# Altium PCB 2022 Power Distribution Board.PcbDoc
Units mil, origin at the board's own origin, x right, y up, seen from the top; angles counter-clockwise.
Board outline 1811.02 x 5944.88 mil, 2 copper layers (Top Layer, Bottom Layer); 23 components, 23 nets, 126 pads, 2 vias.
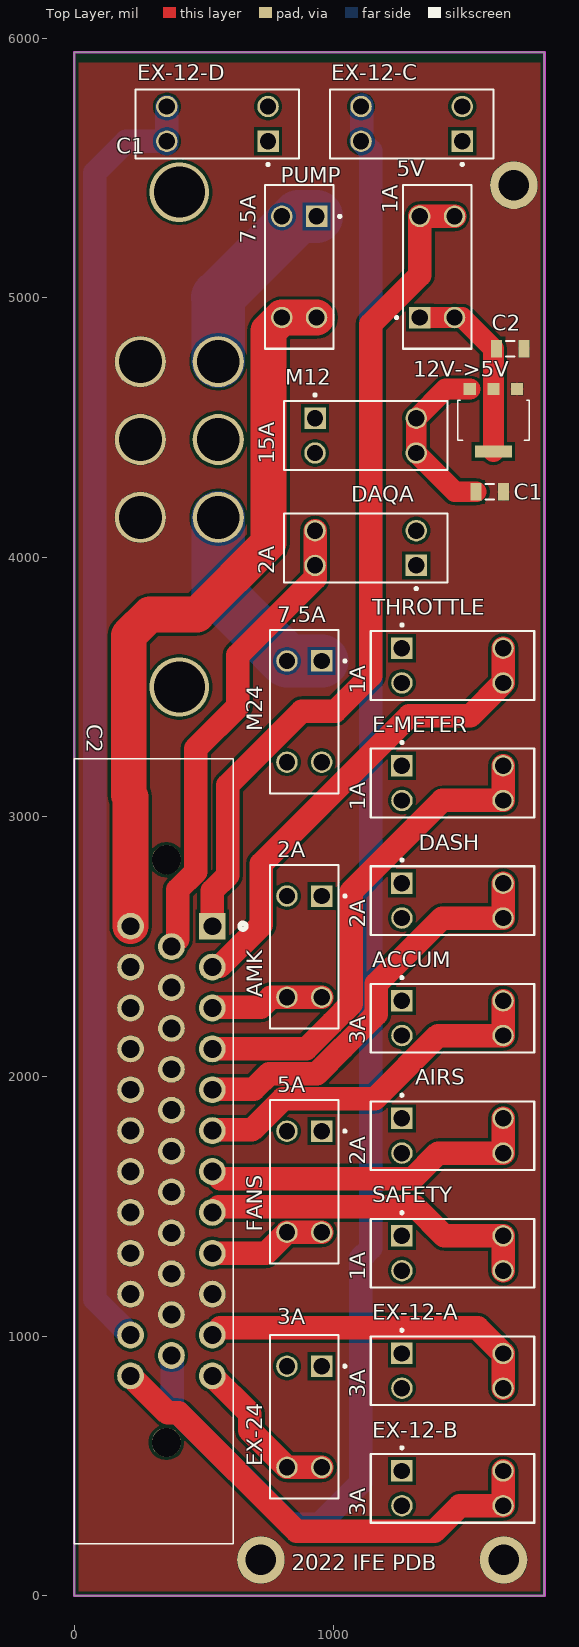
[diagram p0: Top Layer view]
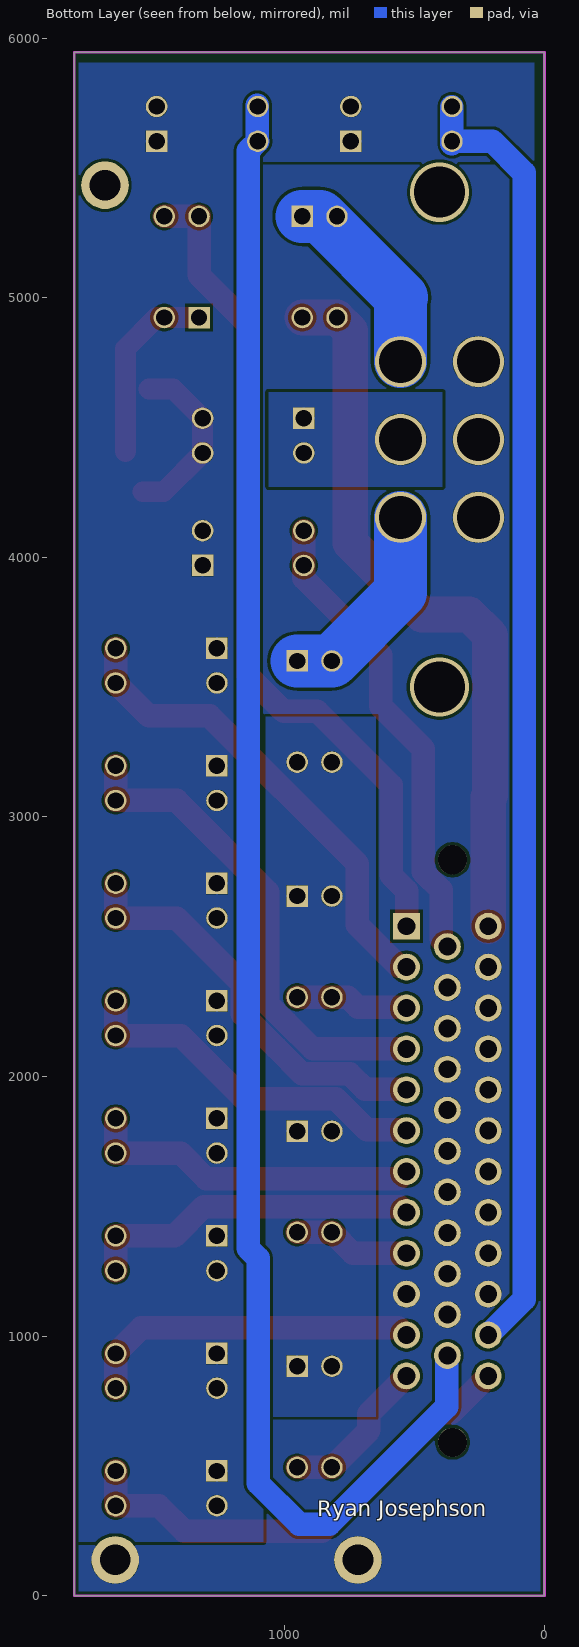
[diagram p1: Bottom Layer view, seen from below]
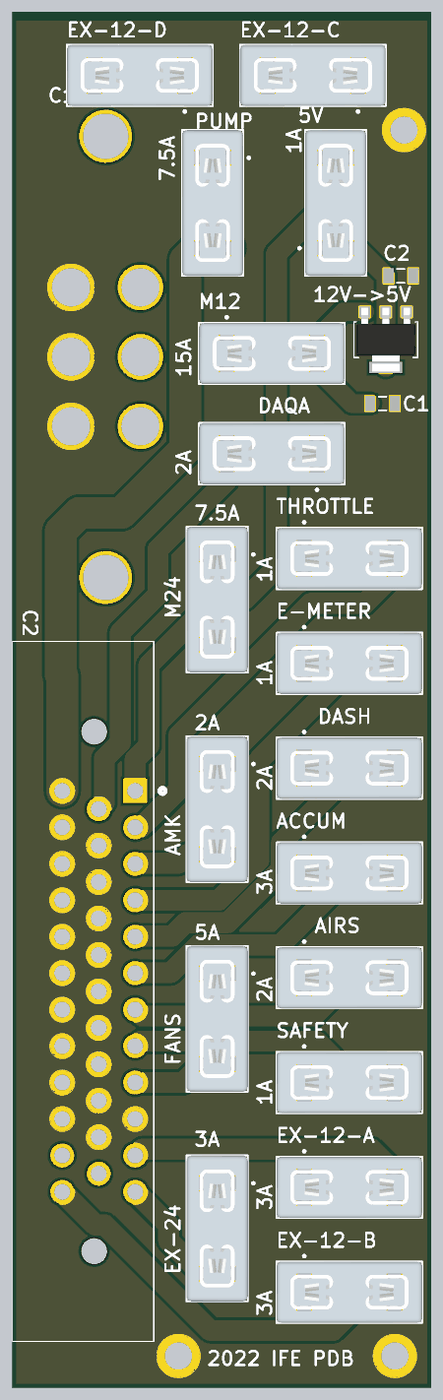
[diagram p2: 3D render of the assembled board from above, using the file's embedded part models]

## Layer stack, top to bottom
Top Solder: solder mask 0.4, Solder Resist, Dk 3.5
Top Layer: signal copper 2.7559
Dielectric 1: dielectric 12.6, FR-4, Dk 4.8
Bottom Layer: signal copper 2.7559
Bottom Solder: solder mask 0.4, Solder Resist, Dk 3.5

## Board outline
0,0 0,5944.88 1811.02,5944.88 1811.02,0

## Design rules (kind name [scope] priority, off if disabled: settings)
Clearance [All] p1: gap=11.81 ignorepadtopadclearanceinfootprint=FALSE except(5.12: SMDPad-SMDPad; 6: Arc-Arc Arc-Track Track-Track; 7.87: Arc-SMDPad Track-SMDPad)
Height [All] p1: minheight=0 maxheight=2000 prefheight=500
PolygonConnect [All] p1: connectstyle=Relief reliefconductorwidth=10 reliefentries=4 polygonreliefangle="90 Angle" airgapwidth=0
RoutingVias [All] p1: holewidth=11.81 width=23.62 viastyle="Through Hole" minholewidth=11.81 minwidth=23.62 maxholewidth=11.81 maxwidth=23.62
SolderMaskExpansion [All] p1: expansion=4 istentingtop=FALSE
Width [All] p1: maxlimit=354.33 minlimit=11.81 preferedwidth=137.8 toplayer_maxwidth=137.8 toplayer_prefwidth=90.55 minimp=50.000000 maximp=50.000000 favimp=50.000000
29 further rules are at their usual default settings.

## Components (designator, comment, footprint, x,y, rotation, side; value= is the part's Value field where it differs from the comment)
5V "5V Sensors" KSTN-3568_V 1397.64,5118.11 r90 top
12V->5V "LDO-SOT223_SPX1117" SOT223 1614.17,4527.56 r180 top (schematic designator "12V to 5V")
ACCUM "Accumulator" KSTN-3568_V 1456.69,2224.41 r0 top
AIRS "AIRS" KSTN-3568_V 1456.69,1771.65 r0 top
AMK "AMK" KSTN-3568_V 885.83,2500 r270 top
C1 "Cap Semi" C1206 1600.39,4251.97 r0 top value=4.7u
C1 "POWER/GND" 19437-0040-Footprint-1 554.33,4153.54 r90 top
C2 "Cap Semi" C1206 1679.13,4803.15 r0 top value=2.2u
C2 "35x CONN" TE_776163-5 354.33,1712.6 r270 top
DAQA "Sensor Board" KSTN-3568_V 1122.05,4035.43 r180 top
DASH "Dashboard" KSTN-3568_V 1456.69,2677.17 r0 top
E-METER "E-Meter" KSTN-3568_V 1456.69,3129.92 r0 top
EX-12-A "EX-12-A" KSTN-3568_V 1456.69,866.14 r0 top
EX-12-B "EX-12-B" KSTN-3568_V 1456.69,413.39 r0 top
EX-12-C "EX-12-C" KSTN-3568_V 1299.21,5669.29 r180 top
EX-12-D "EX-12-D" KSTN-3568_V 551.18,5669.29 r180 top
EX-24 "EX-24" KSTN-3568_V 885.83,688.98 r270 top
FANS "Fans" KSTN-3568_V 885.83,1594.49 r270 top
M12 "MASTER 12V" KSTN-3568_V 1122.05,4468.5 r0 top
M24 "MASTER 24V" KSTN-3568_V 885.83,3405.51 r270 top
PUMP "Pump" KSTN-3568_V 866.14,5118.11 r270 top
SAFETY "Safety" KSTN-3568_V 1456.69,1318.9 r0 top
THROTTLE "Throttle" KSTN-3568_V 1456.69,3582.68 r0 top

## Footprints (in the part's own frame and the unit in brackets; to place one, negate y for a bottom-side part, rotate by r counter-clockwise, add the part's x,y. Pads: shape width x height; smd on the part's side, far side on the other; paste and mask are expansions set on the pad)
19437-0040-Footprint-1 [mm]
  round 5 hole 4.2: 0(15.24,0) 1(7.62,0) 2(0,0) 3(15.24,7.62) 4(7.62,7.62) 5(0,7.62)
C1206 [mm] "Chip Capacitor, Body 3.2x1.6mm, IPC High Density"
  rect 1.1x1.7 smd: 1(-1.35,0) 2(1.35,0)
  silkscreen extent -0.4,-0.75 0.4,0.75, body extent -1.7,-0.9 1.7,0.9, height 1.3
KSTN-3568_V [mm] "THD, 4-Leads, Body 16x6.73mm, Pitch 9.9mm"
  rect 2.1x2.1 hole 1.6: 1(-4.95,1.7)
  round 2.1 hole 1.6: 2(-4.95,-1.7) 3(4.95,1.7) 4(4.95,-1.7)
  silkscreen extent -8,-3.36 8,4.09, body extent -8,-3.37 8,3.37, height 7.44
SOT223 [mm]
  rect 1.2x1.2 smd: 1(-2.3,-3.05) 2(0,-3.05) 3(2.3,-3.05)
  rect 3.6x1.2 smd: 4(0,3.05)
  silkscreen extent -3.5,-1.95 3.5,1.95, body extent -3.25,-3.52 3.25,3.5, height 1.8
TE_776163-5 [mm]
  rect 2.625x2.625 hole 1.75: 1(-22,4.5)
  round 2.625 hole 1.75: 2(-18,4.5) 3(-14,4.5) 4(-10,4.5) 5(-6,4.5) 6(-2,4.5) 7(2,4.5) 8(6,4.5) 9(10,4.5) 10(14,4.5) 11(18,4.5) 12(22,4.5) 13(-20,0.5) 14(-16,0.5) 15(-12,0.5) 16(-8,0.5) 17(-4,0.5) 18(0,0.5) 19(4,0.5) 20(8,0.5) 21(12,0.5) 22(16,0.5) 23(20,0.5) 24(-22,-3.5) 25(-18,-3.5) 26(-14,-3.5) 27(-10,-3.5) 28(-6,-3.5) 29(-2,-3.5) 30(2,-3.5) 31(6,-3.5) 32(10,-3.5) 33(14,-3.5) 34(18,-3.5) 35(22,-3.5)
  round 2.85 hole 2.85 unplated: ""(-28.5,0) ""(28.5,0)
  silkscreen extent -38.4,-9 38.4,7.8

## Part data
5V ACCUM AIRS AMK DAQA DASH E-METER EX-12-A EX-12-B EX-12-C EX-12-D EX-24 FANS M12 M24 PUMP SAFETY THROTTLE: library part CMP-2000-05464-1, "Fuse Holder, 20 A, 500 V, -50 to 145 degC, 4-Pin THD, RoHS", Manufacturer=Keystone, Package Description="4-Pin Through Hole Device, Body 16 x 6.73 mm, Pitch 9.9 mm", Package Reference=3568, Datasheet URL=https://datasheet.ciiva.com/16294/m60-2p40-16294706.pdf, Datasheet Version=04/2013, Manufacturer URL=http://www.keyelco.com/, Mounting Technology=ThroughHole
12V->5V: library part CMP-009-000254-1, Design Item ID=LDO-SOT223_SPX1117, Source=ife19_Elec_Library.schlib
C1 C2: "Capacitor (Semiconductor SIM Model)", LatestRevisionDate=29-May-2009, LatestRevisionNote="IPC-7351 Footprint Added.", PackageDescription="Chip Capacitor", PackageReference=C1206, Published=8-Jun-2000, Publisher="Altium Limited"
C1: library part 19437-0040, ComponentLink1Description="New link", ComponentLink1URL=https://www.mouser.com/ProductDetail/Molex/19437-0040?qs=IvjI65BR3TWbILBHf7ByJQ%3D%3D
C2: library part 776163-5, "Conn Power HDR 23 POS 4mm Solder RA Thru-Hole 23 Terminal 1 Port Automotive", Package=None, Availability=Unavailable, MF="{'manufacturer': 'TE Connectivity'}", MP=776163-5, Price=None

## Free pads (board coordinates)
  round 183.07 hole 118.11: 9(1692.91,5433.07) 10(718.5,137.8) 11(1653.54,137.8)

## Via types
v1: diameter 228.35, hole 196.85, Top Layer to Bottom Layer, 2 vias

## Nets (pads, with @x,y where several pads share a name; then routed paths per layer and width w, separated by ;. In a path a pad name is that pad's centre, name@x,y a point inside that pad or via, vN(x,y) a via of type N, cw(c..) or ccw(c..) an arc to the next point about the centre after c; other vN are vias at no path point)
+5: 5V.1 5V.2 12V->5V.2 12V->5V.4 C2.1@1625.98,4803.15 | length 728.9
  Top Layer w80: 5V.1 5V.2 1494.09,4923.23 1614.17,4803.15 12V->5V.2 12V->5V.4
ACCUMULATOR: ACCUM.3 ACCUM.4 C2.6 | length 1405.6
  Top Layer w90.55: C2.6 533.94,1793.79 684.12,1793.79 803.62,1913.29 1156.82,1913.29 1401.01,2157.48 ACCUM.4 ACCUM.3
AIRS: AIRS.3 AIRS.4 C2.7 | length 1306.1
  Top Layer w90.55: C2.7 534.96,1633.86 562.52,1606.3 1302.58,1606.3 1401.01,1704.72 AIRS.4 AIRS.3
AMK: AMK.3 AMK.4 C2.3 | length 438.4
  Top Layer w90.55: C2.3 533.94,2266.23 718.51,2266.23 757.4,2305.12 AMK.4 AMK.3
DASHBOARD: C2.5 DASH.3 DASH.4 | length 1596
  Top Layer w90.55: C2.5 533.94,1951.27 691.42,1951.27 750,2009.84 933.08,2009.84 1033.38,2110.14 1033.52,2110.14 1147.73,2224.36 1147.73,2224.49 1163.39,2240.14 1163.39,2356.32 1417.3,2610.24 DASH.4 DASH.3
E-METER: C2.4 E-METER.3 E-METER.4 | length 1903.6
  Top Layer w90.55: C2.4 531.59,2106.39 893.09,2106.39 993.39,2206.69 993.52,2206.69 1065.94,2279.11 1065.94,2711.63 1417.3,3062.99 E-METER.4 E-METER.3
EX-12-A: C2.11 EX-12-A.3 EX-12-A.4 | length 1306.1
  Top Layer w90.55: C2.11 534.96,1003.94 562.52,1031.5 1553.15,1031.5 EX-12-A.3 EX-12-A.4
EX-12-B: C2.35 EX-12-B.3 EX-12-B.4 | length 1857.5
  Top Layer w90.55: C2.35 359.25,703.74 401.22,703.74 856.92,248.03 1387.1,248.03 1485.52,346.46 EX-12-B.4 EX-12-B.3
EX-12-C: C2.23 EX-12-C.3 EX-12-C.4 | length 6515.9
  Bottom Layer w90.55: C2.23 376.46,922.75 376.46,728.49 829.36,275.59 944.88,275.59 1102.36,433.07 1102.36,1299.21 1141.73,1338.58 1141.73,5564.96 EX-12-C.3 ; EX-12-C.3@1106.3,5602.36 EX-12-C.4@1106.3,5740.74
EX-12-D: C2.34 EX-12-D.3 EX-12-D.4 | length 5005.3
  Bottom Layer w90.55: C2.34 78.74,1141.73 78.74,5480.39 200.72,5602.36 EX-12-D.3 ; EX-12-D.3@356.3,5592.52 EX-12-D.4
EX-24: C2.12 EX-24.3 EX-24.4 | length 605.3
  Top Layer w90.55: C2.12 676.42,701.53 676.42,636.57 EX-24.4 EX-24.3
FANS: C2.9 FANS.3 FANS.4 | length 454.7
  Top Layer w90.55: C2.9 738.19,1318.9 FANS.4 FANS.3
"FUSED 12V": 12V->5V.3 ACCUM.1 ACCUM.2 AIRS.1 AIRS.2 C1.1@1547.24,4251.97 DAQA.1 DAQA.2 DASH.1 DASH.2 E-METER.1 E-METER.2 EX-12-A.1 EX-12-A.2 EX-12-B.1 EX-12-B.2 EX-12-C.1 EX-12-C.2 EX-12-D.1 EX-12-D.2 M12.3 M12.4 SAFETY.1 SAFETY.2 THROTTLE.1 THROTTLE.2 | length 696
  Top Layer w11.81: C1.1@1535.43,4263.78 C1.1@1547.24,4251.97
  Top Layer w80: 12V->5V.3 1429.86,4647.64 1317.65,4535.43 M12.3 M12.4 1466.54,4251.97 C1.1@1547.24,4251.97
"FUSED 24V": AMK.1 AMK.2 EX-24.1 EX-24.2 FANS.1 FANS.2 M24.3 M24.4
GND: 12V->5V.1 C1.2@1653.54,4251.97 C1.3 C1.4 C1.5 C2.2@1732.28,4803.15 C2.10 C2.14 C2.15 C2.16 C2.17 C2.18 C2.19 C2.20 C2.21 C2.22 C2.25 C2.26 C2.27 C2.28 C2.29 C2.30 C2.31 C2.32 C2.33 pad.9 pad.10 pad.11
PUMP: C2.24 PUMP.3 PUMP.4 | length 2832.3
  Top Layer w137.8: C2.24 216.54,3076.39 209.45,3083.47 209.45,3698.81 290.17,3779.53 472.44,3779.53 748.03,4055.12 748.03,4872.05 PUMP.4 PUMP.3
"RAW 12V": C1.1@554.33,4453.54 M12.1 M12.2
"RAW 24V": C1.2@554.33,4153.54 M24.1 M24.2 | length 796.6
  Bottom Layer w204.72: C1.2@554.33,4153.54 554.33,3864.96 M24.2 M24.1
"RAW 48V": C1.0 PUMP.1 PUMP.2 | length 761.1
  Bottom Layer w204.72: 551.18,5000 554.33,5003.15 ; C1.0 554.33,5003.15 ; PUMP.1 864.17,5312.99 554.33,5003.15
SAFETY: C2.8 SAFETY.3 SAFETY.4 | length 1309.4
  Top Layer w90.55: C2.8 534.96,1476.38 556.61,1498.03 1313.02,1498.03 1425.22,1385.83 SAFETY.3 SAFETY.4
"SENSOR BOARD": C2.13 DAQA.3 DAQA.4 | length 1831.5
  Top Layer w90.55: C2.13 374.02,2503.46 398.62,2528.07 398.62,2718.86 467.52,2787.76 467.52,3262.8 629.92,3425.2 629.92,3622.05 927.17,3919.29 DAQA.3 DAQA.4
Sensors: 5V.3 5V.4 C2.1@531.5,2578.74 | length 3274.9
  Top Layer w90.55: C2.1@531.5,2578.74 531.5,2715.19 590.55,2774.25 590.55,3121.48 875.77,3406.7 1005.12,3406.7 1141.73,3543.31 1141.73,4897.66 1330.71,5086.64 5V.3 5V.4
THROTTLE: C2.2@531.5,2421.26 THROTTLE.3 THROTTLE.4 | length 1845.1
  Top Layer w90.55: C2.2@531.5,2421.26 533.94,2423.71 560.54,2423.71 720.47,2583.64 720.47,2818.92 1290.34,3388.79 1524.62,3388.79 THROTTLE.4 THROTTLE.3
pads on no net: C2.
copper on no net:
  other v1: 404.33,3500.39 404.33,5406.3

## Polygon pours and split planes (outlines as drawn)
"FUSED 12V" on Bottom Layer "FUSED_12V_L02_P001" (solid, pour order 1): 1811.02,5905.51 1082.68,5905.51 1082.68,206.69 1811.02,206.69
"FUSED 12V" on Bottom Layer "FUSED_12V_L02_P006" (solid, pour order 6): 39.37,5905.51 39.37,5511.81 1220.47,5511.81 1220.47,5905.51
"FUSED 24V" on Bottom Layer "FUSED_24V_L02_P002" (solid, pour order 2): 649.61,3385.83 1072.83,3385.83 1072.83,688.98 649.61,688.98
GND on Bottom Layer "GND_L02_P004" (solid, pour order 4): 0,5511.81 1811.02,5511.81 1811.02,0 0,0
"RAW 12V" on Bottom Layer "RAW_12V_L02_P000" (solid, pour order 0): 393.7,4635.83 1062.99,4635.83 1062.99,4271.65 393.7,4271.65
GND on Top Layer "GND_L01_P005" (solid, pour order 5): 0,5905.51 1811.02,5905.51 1811.02,0 0,0

## Keep-outs
Keep-Out Layer:
  the board outline again, w10

## Silkscreen, mask and mechanical layers (free items; w line width, h text height)
Top Overlay:
  text "1A" at 1245.91,5324.96 h60 r90
  text "7.5A" at 698.66,5206.85 h60 r90
  text "15A" at 769.53,4360.39 h60 r90
  text "2A" at 769.53,3935.2 h60 r90
  text "7.5A" at 781.65,3750.16 h60
  text "1A" at 1119.92,3474.57 h60 r90
  text "1A" at 1119.92,3025.75 h60 r90
  text "2A" at 781.65,2844.65 h60
  text "2A" at 1119.92,2572.99 h60 r90
  text "3A" at 1119.92,2124.17 h60 r90
  text "5A" at 781.65,1939.13 h60
  text "2A" at 1119.92,1659.61 h60 r90
  text "1A" at 1119.92,1214.72 h60 r90
  text "3A" at 781.65,1045.43 h60
  text "3A" at 1119.92,761.97 h60 r90
  text "3A" at 1119.92,305.28 h60 r90
  text "2022 IFE PDB" at 836.77,98.58 h60
Bottom Overlay:
  text "Ryan Josephson" at 875.83,305.58 h60

## Text inside footprints (layer, text, board x,y; h text height)
C2: Mechanical 13 "PCB EDGE" at 9.22,2179.98 h50.09 r270